# Altium PCB 把手指纹密码锁20201030.PcbDoc (part 2 of 2)
Units mm, origin at the board's own origin, x right, y up, seen from the top; angles counter-clockwise.
Board outline 142.19 x 18 mm, 2 copper layers (Top Layer, Bottom Layer); 76 components, 61 nets, 259 pads, 300 vias.
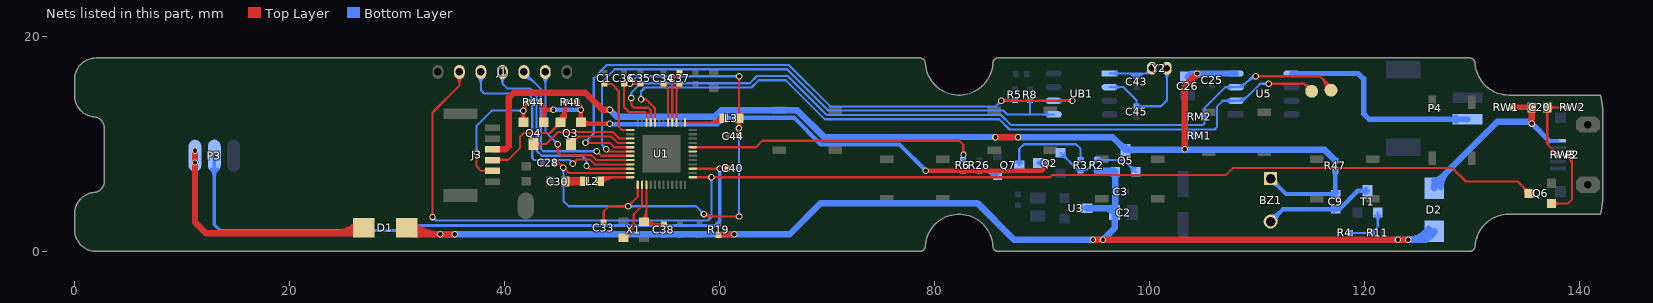
[diagram p2: the nets of this part, all layers, seen from the top]

## Via types
v1: diameter 0.6, hole 0.4, Top Layer to Bottom Layer, tented both sides, 300 vias

## Nets (pads, with @x,y where several pads share a name; then routed paths per layer and width w, separated by ;. In a path a pad name is that pad's centre, name@x,y a point inside that pad or via, vN(x,y) a via of type N, cw(c..) or ccw(c..) an arc to the next point about the centre after c; other vN are vias at no path point) (continued)
MOTO-: P4.1 U5.5 | length 21
  Bottom Layer w0.5: U5.5@113.225,16.555 119.42,16.555 119.925,16.05 119.925,12.825 120.45,12.3 P4.1@129.6,12.3 ; P4.1@128.523,12.123 ccw(c128.096,11.696) 128.096,12.3 ccw(c128.096,12.904) P4.1@128.523,12.477
NetBZ1_1: BZ1.1 C9.1 R47.1 | length 15.6
  Bottom Layer w0.2: C9.1@117.113,5.548 ccw(c116.601,6.06) 117.325,6.06 ccw(c118.049,6.06) C9.1@117.537,5.548 ; R47.1@117.217,7.333 cw(c116.955,7.071) 117.325,7.071 ; R47.1@117.3,7.442 117.325,7.417 C9.1@117.325,5.336 ; 117.325,7.069 cw(c117.698,7.069) R47.1@117.434,7.333
  Bottom Layer w0.4: BZ1.1@111.275,6.375 cw(c111.275,5.409) 111.958,6.092 cw(c112.641,6.775) BZ1.1@111.675,6.775 ; BZ1.1@111.275,6.775 112.714,5.336 C9.1@117.325,5.336 117.3,5.361 R47.1@117.3,7.442 ; C9.1@117.134,5.195 ccw(c116.792,4.853) 116.792,5.336 ccw(c116.792,5.819) 117.134,5.478 ccw(c116.732,5.879) 117.3,5.879 ; 117.3,5.759 ccw(c117.697,5.759) C9.1@117.416,5.478
NetBZ1_2: BZ1.2 C9.2 T1.3 | length 14.6
  Bottom Layer w0.4: BZ1.2@111.275,2.775 112.414,3.914 C9.2@117.325,3.914 117.664,3.914 119.391,5.641 T1.3@120.3,5.641 ; BZ1.2@111.275,3.225 ccw(c111.275,4.311) 112.043,3.543 ccw(c112.811,2.775) BZ1.2@111.725,2.775 ; C9.2@117.134,3.772 ccw(c116.792,3.431) 116.792,3.914 ccw(c116.792,4.397) C9.2@117.134,4.055 ; C9.2@117.375,4.114 ccw(c117.375,5.294) 118.209,4.459 ; T1.3@120.118,5.459 ccw(c119.679,5.02) 119.679,5.641 ccw(c119.679,6.262) T1.3@120.118,5.823
NetC1_1: C1.1 U1.37 | length 6.7
  Top Layer w0.2: C1.1@49.3,15.592 49.967,15.592 50.625,14.934 50.625,11.6 50.925,11.3 U1.37@51.7,11.3 ; C1.1@49.434,15.483 cw(c49.697,15.22) 49.697,15.592 cw(c49.697,15.964) C1.1@49.434,15.701
NetC20_2: C20.2 RW2.2 RW3.2 | length 10.1
  Top Layer w0.2: C20.2@136.799,13.138 cw(c136.287,12.626) 137.011,12.626 cw(c137.735,12.626) C20.2@137.223,13.138 ; C20.2@137.223,13.188 cw(c137.735,12.676) 137.735,13.4 cw(c137.735,14.124) C20.2@137.223,13.612 ; 137.686,9.306 ccw(c137.992,9.613) RW3.2@137.992,9.179 ; RW3.2@137.747,9.245 cw(c137.528,9.025) RW3.2@137.838,9.025 ; RW3.2@137.992,9 137.011,9.981 C20.2@137.011,13.4 RW2.2@138.892,13.4 ; RW2.2@138.783,13.291 ccw(c138.52,13.028) 138.52,13.4 ccw(c138.52,13.772) RW2.2@138.783,13.509
NetC30_1: C30.1 L2.1 | length 1.8
  Top Layer w0.8: C30.1@45.661,6.5 45.686,6.525 L2.1@47.439,6.525
NetC34_1: C34.1 U1.29 | length 4.3
  Top Layer w0.2: C34.1@54.8,15.592 55.2,15.192 U1.29@55.2,12 ; C34.1@54.825,15.438 cw(c54.825,15.128) C34.1@55.045,15.347 ; C34.1@54.979,15.592 ccw(c55.413,15.592) 55.106,15.286
NetC37_1: C37.1 U1.28 | length 5.5
  Top Layer w0.2: U1.28@55.6,12 55.6,15.958 C37.1@56.275,16.633 ; 55.969,16.327 ccw(c55.662,16.633) C37.1@56.096,16.633 ; C37.1@56.03,16.388 cw(c56.25,16.169) C37.1@56.25,16.479
NetC37_2: C37.2 U1.27 | length 5.8
  Top Layer w0.2: U1.27@56,12 56,15.342 ; 56,14.643 cw(c57.224,14.643) C37.2@56.358,15.508 ; 56,15.125 cw(c56.741,15.125) C37.2@56.217,15.65 ; C37.2@56.03,15.372 cw(c56.25,15.153) C37.2@56.25,15.463 ; C37.2@56.096,15.604 cw(c55.765,15.577) 56,15.342 ; C37.2@56.275,15.617 56,15.342
NetC38_2: C38.2 U1.3 X1.3 | length 10.3
  Top Layer w0.2: X1.3@52.813,2.987 ccw(c51.878,3.922) 53.2,3.922 ; X1.3@52.954,2.704 ccw(c53.368,3.118) X1.3@53.368,2.533 ; X1.3@52.954,2.846 ccw(c52.361,3.439) 53.2,3.439 ; X1.3@53.096,2.846 ccw(c53.851,3.601) 53.851,2.533 ; U1.3@53.2,6.2 53.2,3 X1.3@52.975,2.775 53.217,2.533 C38.2@54.825,2.533 ; X1.3@53.237,2.987 ccw(c54.334,4.084) 54.334,2.533 ; C38.2@54.691,2.424 ccw(c54.428,2.161) 54.428,2.533 ccw(c54.428,2.905) C38.2@54.691,2.642
NetC43_1: C43.1 UB1.1 Y2.1 | length 8.8
  Bottom Layer w0.2: UB1.1@96.3,16.555 C43.1@98.8,16.555 ; UB1.1@96.891,16.414 cw(c97.233,16.072) 97.233,16.555 cw(c97.233,17.038) UB1.1@96.891,16.696 ; 97.806,16.555 cw(c97.806,15.34) C43.1@98.666,16.199 ; 98.289,16.555 cw(c98.289,15.823) C43.1@98.807,16.341 ; C43.1@98.791,16.339 cw(c99.279,15.897) 99.279,16.555 ; C43.1@98.8,16.308 98.8,16.53 98.825,16.555 99.73,16.555 ; C43.1@98.94,16.205 cw(c99.73,15.488) 99.73,16.555 ; 99.734,16.559 ccw(c99.392,16.9) Y2.1@99.875,16.9 ; Y2.1@100.05,16.597 ccw(c99.917,16.368) 99.73,16.555 ; Y2.1@100.225,17.05 99.73,16.555
NetC45_2: C45.2 UB1.2 Y2.2 | length 12.9
  Bottom Layer w0.2: UB1.2@96.3,15.285 97.59,15.285 98.8,14.075 C45.2@98.8,13.508 101.083,13.508 101.625,14.05 Y2.2@101.625,17.05 ; UB1.2@96.891,15.144 cw(c97.233,14.802) 97.233,15.285 cw(c97.233,15.768) UB1.2@96.891,15.426 ; C45.2@98.691,13.617 ccw(c98.428,13.88) 98.8,13.88 ccw(c99.172,13.88) C45.2@98.909,13.617 ; C45.2@98.934,13.399 cw(c99.197,13.136) 99.197,13.508 cw(c99.197,13.88) C45.2@98.934,13.617 ; Y2.2@101.378,16.653 cw(c100.78,16.055) 101.625,16.055 cw(c102.47,16.055) Y2.2@101.873,16.653
NetD1_1: D1.1 P3.3 | length 27.9
  Top Layer w0.6: v1(11.2,8.275) 11.2,2.725 12.225,1.7 26.4,1.7 D1.1@26.9,2.2 ; v1(11.2,9.375) 11.2,8.325 v1@11.225,8.3 ; 24.144,1.7 ccw(c24.144,4.856) D1.1@26.376,2.624 ; 25.593,1.7 ccw(c25.593,3.407) D1.1@26.8,2.2
  Bottom Layer w0.6: v1(11.2,8.275) v1(11.2,9.375)
NetL2_2: L2.2 U1.48 | length 6.2
  Top Layer w0.2: L2.2@48.79,6.646 cw(c49.404,6.032) 49.404,6.9 ; L2.2@48.861,6.525 49.236,6.9 U1.48@51.7,6.9 ; L2.2@48.932,6.504 cw(c49.887,5.549) 49.887,6.9 ; L2.2@49.073,6.363 cw(c50.37,5.066) 50.37,6.9
NetL3_1: L3.1 U1.25 | length 7.1
  Top Layer w0.2: U1.25@56.8,12 59.989,12 L3.1@60.389,12.4 ; 58.82,12 ccw(c58.82,13.919) L3.1@60.177,12.562 ; 59.302,12 ccw(c59.302,13.436) L3.1@60.318,12.421 ; 59.785,12 ccw(c59.785,12.954) L3.1@60.46,12.279
NetQ2_G: Q2.G Q5.G R2.2 R3.1 | length 14
  Bottom Layer w0.2: Q2.G@91.741,8.818 cw(c91.741,7.955) 92.351,8.565 cw(c92.961,9.175) Q2.G@92.098,9.175 ; Q2.G@91.741,9.175 93.291,7.625 ; 93.034,7.882 ccw(c93.575,8.422) R3.1@93.575,7.658 ; R3.1@93.412,7.504 R3.1@93.6,7.504 ; R3.1@93.421,7.499 ccw(c93.291,7.495) 93.291,7.625 ; R3.1@93.473,7.619 cw(c93.385,7.719) 93.291,7.625 ; R3.1@93.745,7.407 cw(c94.205,7.031) 94.205,7.625 ; 94.794,8.214 ccw(c94.487,8.52) R2.2@94.921,8.52 ; R2.2@94.855,8.275 cw(c95.075,8.055) R2.2@95.075,8.366 ; R2.2@95.234,8.411 cw(c95.497,8.148) 95.497,8.52 cw(c95.497,8.892) R2.2@95.234,8.629 ; Q5.G@98.368,7.409 ccw(c97.505,7.409) 98.115,8.019 ccw(c98.725,8.629) Q5.G@98.725,7.766 ; Q5.G@98.725,7.409 97.614,8.52 R2.2@95.1,8.52 94.205,7.625 ; 93.291,7.625 94.205,7.625
NetQ6_B: Q6.B RW3.1 | length 10.1
  Top Layer w0.2: Q6.B@137.416,4.45 138.925,4.45 139.325,4.85 139.325,8.683 RW3.1@139.008,9 ; Q6.B@137.646,4.22 cw(c138.201,3.665) 138.201,4.45 cw(c138.201,5.235) Q6.B@137.646,4.68 ; RW3.1@138.899,8.866 cw(c137.871,7.838) 139.325,7.838 ; RW3.1@139.008,8.821 cw(c139.008,8.387) 139.314,8.694 ; RW3.1@139.041,9.007 cw(c138.354,8.32) 139.325,8.32 ; RW3.1@139.162,8.975 ccw(c139.472,8.975) RW3.1@139.253,8.755
NetQ7_B: Q7.B R6.1 R26.1 | length 11
  Bottom Layer w0.2: R6.1@82.65,7.504 R26.1@84.175,7.504 ; R6.1@82.784,7.395 cw(c83.047,7.132) 83.047,7.504 cw(c83.047,7.876) R6.1@82.784,7.613 ; R26.1@84.041,7.395 ccw(c83.778,7.132) 83.778,7.504 ccw(c83.778,7.876) R26.1@84.041,7.613 ; R26.1@84.282,7.373 cw(c84.467,7.074) 84.548,7.417 ; R26.1@84.309,7.395 cw(c84.572,7.132) 84.572,7.504 cw(c84.572,7.876) R26.1@84.309,7.613 ; R26.1@84.331,7.585 ccw(c84.664,7.792) 84.575,7.41 ; 84.622,7.504 cw(c84.622,5.97) Q7.B@85.766,6.992 ; 85.069,7.504 cw(c85.069,6.369) Q7.B@85.915,7.125 ; 85.515,7.504 cw(c85.515,6.768) Q7.B@86.064,7.258 ; Q7.B@85.54,7.139 ccw(c85.145,7.219) 85.43,7.504 ; Q7.B@85.617,6.859 ccw(c84.175,5.571) R26.1@84.175,7.504 ; Q7.B@85.795,7.394 cw(c85.715,7.789) 85.43,7.504 ; Q7.B@85.859,7.075 85.43,7.504 ; R26.1@84.175,7.504 85.43,7.504
NetQ7_C: Q7.C R3.2 | length 10.4
  Bottom Layer w0.2: Q7.C@87.661,8.255 ccw(c87.106,8.81) 87.891,8.81 ccw(c88.676,8.81) Q7.C@88.121,8.255 ; Q7.C@87.891,8.025 87.891,9.541 88.325,9.975 93.175,9.975 93.6,9.55 R3.2@93.6,8.52 ; R3.2@93.491,8.629 ccw(c93.228,8.892) 93.6,8.892 ccw(c93.972,8.892) R3.2@93.709,8.629
NetR4_1: R4.1 R11.1 T1.1 | length 7.2
  Bottom Layer w0.2: R4.1@118.683,1.725 120.692,1.725 R11.1@120.717,1.75 121.25,2.283 T1.1@121.25,3.609 ; R4.1@118.792,1.616 cw(c119.055,1.353) 119.055,1.725 cw(c119.055,2.097) R4.1@118.792,1.834 ; 120.344,1.725 cw(c120.344,1.352) R11.1@120.608,1.616 ; 120.346,1.725 ccw(c120.346,2.095) R11.1@120.608,1.833 ; R11.1@120.717,1.929 ccw(c120.717,2.363) 121.023,2.056 ; R11.1@120.871,1.775 cw(c121.181,1.775) R11.1@120.962,1.995 ; T1.1@120.997,3.356 cw(c120.388,2.747) 121.25,2.747 cw(c122.112,2.747) T1.1@121.503,3.356
NetU1_2: U1.2 X1.1 | length 6.8
  Top Layer w0.2: X1.1@51.075,1.275 52.025,2.225 52.025,3.475 52.8,4.25 U1.2@52.8,6.2 ; X1.1@51.125,1.575 ccw(c51.125,2.179) 51.552,1.752 ; X1.1@51.425,1.275 cw(c52.27,1.275) 51.672,1.872
P04/SCK: J1.3 U1.43 | length 20.1
  Top Layer w0.2: v1@48.575,9.125 cw(c48.575,8.642) 48.916,8.984 cw(c49.258,9.325) v1@48.775,9.325 ; v1(48.575,9.325) 49,8.9 51.234,8.9 U1.43@51.7,8.9
  Bottom Layer w0.2: J1.3@41.8,16.15 cw(c41.8,14.822) 42.739,15.761 ; J1.3@41.8,16.35 cw(c41.8,15.505) 42.397,16.103 ; J1.3@41.8,16.7 43.375,15.125 43.375,9.575 ; J1.3@42.2,16.55 ccw(c42.804,16.55) 42.377,16.123 ; 43.381,9.55 43.606,9.325 v1(48.575,9.325) ; v1@48.434,9.184 ccw(c48.092,8.842) 48.092,9.325 ccw(c48.092,9.808) v1@48.434,9.466
P05/MOSI: J1.2 U1.44 | length 18
  Top Layer w0.2: v1@44.809,9.834 cw(c44.467,9.492) 44.95,9.492 cw(c45.433,9.492) v1@45.091,9.834 ; v1(44.95,9.975) 44.95,9.25 45.25,8.95 48.101,8.95 48.551,8.5 U1.44@51.7,8.5
  Bottom Layer w0.2: J1.2@43.517,16.267 cw(c42.834,15.584) 43.8,15.584 cw(c44.766,15.584) J1.2@44.083,16.267 ; J1.2@43.8,16.7 43.8,11.125 v1(44.95,9.975) ; v1@44.75,9.975 ccw(c44.267,9.975) 44.609,10.316 ccw(c44.95,10.658) v1@44.95,10.175
P06/MISO: J1.5 U1.45 | length 24.7
  Top Layer w0.2: v1(46.35,8.15) 46.75,8.55 47.936,8.55 48.386,8.1 49,8.1 U1.45@51.7,8.1 ; v1@46.35,8.35 ccw(c46.35,8.833) 46.691,8.491 ccw(c47.033,8.15) v1@46.55,8.15
  Bottom Layer w0.2: J1.5@37.517,16.267 cw(c36.834,15.584) 37.8,15.584 cw(c38.766,15.584) J1.5@38.083,16.267 ; J1.5@37.8,16.7 37.8,15.025 38.125,14.7 42.15,14.7 42.575,14.275 42.575,8.7 42.775,8.5 46.078,8.5 ; 46.141,8.437 ccw(c46.35,8.645) v1@46.35,8.35 ; v1@46.157,8.202 ccw(c45.86,8.283) 46.078,8.5 ; v1@46.252,8.325 46.078,8.5
P07/NSS: J1.4 U1.46 | length 22.3
  Top Layer w0.2: v1@47.55,7.925 v1@47.575,7.9 ; v1(47.625,7.95) 47.875,7.7 ; v1@47.673,7.756 cw(c47.725,7.55) 47.875,7.7 ; v1@47.819,7.902 ccw(c48.025,7.85) 47.875,7.7 ; U1.46@51.7,7.7 47.875,7.7
  Bottom Layer w0.2: J1.4@39.526,16.259 cw(c38.931,15.625) 39.8,15.625 ; J1.4@39.8,16.7 39.8,15.625 ; J1.4@40.074,16.259 ccw(c40.669,15.625) 39.8,15.625 ; v1@47.484,8.091 ccw(c47.142,8.433) 47.625,8.433 ccw(c48.108,8.433) v1@47.766,8.091 ; v1(47.625,7.95) 47.625,8.475 47.2,8.9 43.45,8.9 42.975,9.375 42.975,14.575 42.375,15.175 40.25,15.175 39.8,15.625
PWR_CTL: R6.2 U1.20 | length 29
  Top Layer w0.2: U1.20@57.5,9.7 63.391,9.7 63.991,10.3 82.3,10.3 82.675,9.925 82.675,9.025 v1(82.7,9) ; v1@82.559,9.141 ccw(c82.278,9.422) 82.675,9.422 ; 82.675,9.543 ccw(c83.243,9.543) v1@82.841,9.141
  Bottom Layer w0.2: R6.2@82.567,8.629 ccw(c82.244,8.951) v1@82.7,8.951 ; v1@82.571,8.847 cw(c82.338,8.57) R6.2@82.7,8.57 ; R6.2@82.65,8.52 R6.2@82.7,8.57 ; v1@82.7,8.832 ccw(c82.988,8.832) R6.2@82.784,8.629 ; v1(82.7,9) R6.2@82.7,8.57 ; v1@82.829,8.847 ccw(c83.062,8.57) R6.2@82.7,8.57
REMOTO: U1.19
RSTN: J1.6 Q6.C U1.13 | length 130.5
  Top Layer w0.2: v1@33.159,3.341 ccw(c32.817,3.683) 33.3,3.683 ccw(c33.783,3.683) v1@33.441,3.341 ; v1(33.3,3.2) 33.3,12.925 35.8,15.425 J1.6@35.8,16.7 ; J1.6@35.517,16.267 cw(c34.834,15.584) 35.8,15.584 cw(c36.766,15.584) J1.6@36.083,16.267 ; U1.13@57.5,6.9 v1(59.25,6.9) 90.744,6.9 90.944,7.1 107.1,7.1 107.75,7.75 128.2,7.75 129.45,6.5 134.284,6.5 Q6.C@135.384,5.4 ; v1@59.109,6.759 ccw(c58.767,6.417) 58.767,6.9 ccw(c58.767,7.383) v1@59.109,7.041 ; v1@59.391,6.759 cw(c59.733,6.417) 59.733,6.9 cw(c59.733,7.383) v1@59.391,7.041 ; 134.701,6.083 cw(c134.018,5.4) Q6.C@134.984,5.4 ; 134.882,5.902 ccw(c135.309,6.329) Q6.C@135.309,5.725 ; Q6.C@135.043,5.741 cw(c134.701,5.4) Q6.C@135.184,5.4
  Bottom Layer w0.2: v1(33.3,3.2) 33.625,2.875 ; v1@33.307,3 cw(c33.322,2.572) 33.625,2.875 ; v1@33.5,3.193 ccw(c33.928,3.178) 33.625,2.875 ; v1@59.109,6.759 cw(c58.767,6.417) 59.25,6.417 cw(c59.733,6.417) v1@59.391,6.759 ; v1(59.25,6.9) 59.25,3.2 58.925,2.875 33.625,2.875
RX2/MOTO0: pad.0 RM1.2 U1.32 U5.2 | length 79.2
  Top Layer w0.2: v1(52.7,14.15) 53.166,14.15 ; v1@52.845,14.012 cw(c53.166,13.708) 53.166,14.15 ; v1@52.845,14.288 ccw(c53.166,14.592) 53.166,14.15 ; U1.32@54,12 54,13.309 53.25,14.059 53.25,14.066 53.166,14.15 ; v1(111.1,15.6) 114.4,15.6 ; v1@111.241,15.459 cw(c111.583,15.117) 111.583,15.6 cw(c111.583,16.083) v1@111.241,15.741 ; pad.0@114.606,14.975 ccw(c113.884,15.084) 114.4,15.6 ; pad.0@115.025,15.394 cw(c114.916,16.116) 114.4,15.6 ; pad.0@115.1,14.9 114.4,15.6
  Bottom Layer w0.2: v1@52.559,14.291 ccw(c52.217,14.633) 52.7,14.633 ccw(c53.183,14.633) v1@52.841,14.291 ; v1(52.7,14.15) 52.7,14.875 53.075,15.25 62.984,15.25 63.659,15.925 66.175,15.925 69.8,12.3 86.032,12.3 86.982,11.35 104.125,11.35 ; RM1.2@104.008,10.884 ccw(c103.745,11.147) 104.117,11.147 ccw(c104.489,11.147) RM1.2@104.226,10.884 ; RM1.2@104.117,10.75 104.117,11.342 104.125,11.35 ; U5.2@107.434,13.874 ccw(c107.092,13.532) 107.092,14.015 ccw(c107.092,14.498) U5.2@107.434,14.156 ; U5.2@108.475,14.015 ccw(c108.475,14.594) 108.885,14.185 ; U5.2@108.475,14.215 ccw(c108.475,15.277) 109.226,14.526 ; v1@110.959,15.459 ccw(c110.617,15.117) 110.617,15.6 ccw(c110.617,16.083) v1@110.959,15.741 ; v1(111.1,15.6) 110.3,15.6 108.715,14.015 U5.2@108.025,14.015 106.815,14.015 106.3,13.5 106.3,11.6 106.05,11.35 104.125,11.35
SCL: R5.1 U1.41 UB1.6 | length 67
  Top Layer w0.2: v1(47.527,10.1) 49.8,10.1 50.2,9.7 U1.41@51.7,9.7 ; v1@47.669,9.959 cw(c48.01,9.618) 48.01,10.1 cw(c48.01,10.583) v1@47.669,10.242 ; v1(86.225,14.015) v1(92.84,14.015) ; v1@86.366,13.874 cw(c86.708,13.532) 86.708,14.015 cw(c86.708,14.498) v1@86.366,14.156 ; v1@92.699,13.874 ccw(c92.357,13.532) 92.357,14.015 ccw(c92.357,14.498) v1@92.699,14.156
  Bottom Layer w0.2: v1(47.527,10.1) 47.527,10.202 48.3,10.975 48.3,16.125 49.525,17.35 66.447,17.35 70.297,13.5 85.71,13.5 v1(86.225,14.015) 87.423,14.015 R5.1@87.475,14.067 ; v1@47.527,10.3 ccw(c47.527,10.538) 47.695,10.37 ; v1@47.727,10.1 cw(c48.456,10.1) 47.941,10.616 ; v1@86.025,14.015 cw(c85.542,14.015) 85.884,13.674 cw(c86.225,13.332) v1@86.225,13.815 ; v1@86.366,13.874 cw(c86.708,13.532) 86.708,14.015 cw(c86.708,14.498) v1@86.366,14.156 ; 86.952,14.015 ccw(c86.952,14.564) R5.1@87.341,14.176 ; UB1.6@91.1,14.015 v1(92.84,14.015) ; UB1.6@91.691,13.874 cw(c92.033,13.532) 92.033,14.015 cw(c92.033,14.498) UB1.6@91.691,14.156 ; v1@92.699,13.874 ccw(c92.357,13.532) 92.357,14.015 ccw(c92.357,14.498) v1@92.699,14.156
SDA: R8.1 U1.42 UB1.5 | length 56.4
  Top Layer w0.2: v1(49.475,9.5) 49.675,9.3 U1.42@51.7,9.3
  Bottom Layer w0.2: v1@49.275,9.5 ccw(c48.792,9.5) 49.134,9.841 ccw(c49.475,10.183) v1@49.475,9.7 ; v1(49.475,9.5) 49.077,9.898 49.077,15.777 50.25,16.95 66.281,16.95 70.056,13.175 70.131,13.1 86.425,13.1 86.78,12.745 88.9,12.745 ; R8.1@88.791,13.958 cw(c88.528,13.695) 88.9,13.695 cw(c89.272,13.695) R8.1@89.009,13.958 ; R8.1@88.9,14.067 88.9,12.745 ; UB1.5@90.509,12.604 ccw(c90.167,12.262) 90.167,12.745 ccw(c90.167,13.228) UB1.5@90.509,12.886 ; UB1.5@91.1,12.745 88.9,12.745
SETKEY: C40.1 P3.2 U1.15 | length 66.5
  Top Layer w0.2: U1.15@57.5,7.7 v1(60.025,7.7) 60.692,7.7 C40.1@60.717,7.725 ; v1@59.884,7.559 ccw(c59.542,7.217) 59.542,7.7 ccw(c59.542,8.183) v1@59.884,7.841 ; v1@60.166,7.559 cw(c60.508,7.217) 60.508,7.7 cw(c60.508,8.183) v1@60.166,7.841 ; 60.344,7.7 cw(c60.344,7.327) C40.1@60.608,7.591 ; 60.346,7.7 ccw(c60.346,8.07) C40.1@60.608,7.808
  Bottom Layer w0.3: P3.2@12.682,7.682 cw(c11.914,6.914) 13,6.914 cw(c14.086,6.914) P3.2@13.318,7.682 ; P3.2@13,8.9 13,2.5 13.55,1.95 31.45,1.95 31.925,2.425 59.65,2.425 60.025,2.8 v1(60.025,7.7) ; v1@59.919,7.594 cw(c59.663,7.338) 60.025,7.338 cw(c60.387,7.338) v1@60.131,7.594
TX2/MOTO1: pad.1 RM2.2 U1.33 U5.3 | length 85.4
  Top Layer w0.2: v1@51.659,14.134 cw(c51.317,13.792) 51.8,13.792 cw(c52.283,13.792) v1@51.941,14.134 ; v1(51.8,14.275) 51.8,13.625 52.05,13.375 53.369,13.375 53.6,13.144 U1.33@53.6,12 ; v1(109.9,16.3) 115.9,16.3 ; v1@110.041,16.159 cw(c110.383,15.817) 110.383,16.3 cw(c110.383,16.783) v1@110.041,16.441 ; 116.223,15.977 cw(c115.31,15.064) pad.1@116.6,15.012 ; pad.1@116.4,15.02 ccw(c114.689,15.089) 115.9,16.3 ; 116.546,15.654 cw(c115.931,15.039) pad.1@116.8,15.004 ; 116.559,15.641 ccw(c116.9,15.983) pad.1@116.9,15.5 ; pad.1@116.9,15 116.9,15.3 115.9,16.3
  Bottom Layer w0.2: v1@51.659,14.416 ccw(c51.317,14.758) 51.8,14.758 ccw(c52.283,14.758) v1@51.941,14.416 ; v1(51.8,14.275) 51.8,14.772 52.678,15.65 62.819,15.65 63.494,16.325 66.341,16.325 69.966,12.7 86.198,12.7 87.148,11.75 104.95,11.75 105.133,11.933 RM2.2@105.133,12.55 105.133,13.358 107.06,15.285 U5.3@108.025,15.285 108.585,15.285 109.6,16.3 v1(109.9,16.3) ccw(c109.9,15.576) 109.388,16.088 ; RM2.2@105.024,12.416 cw(c104.761,12.153) 105.133,12.153 cw(c105.505,12.153) RM2.2@105.242,12.416 ; RM2.2@105.024,12.684 ccw(c104.761,12.947) 105.133,12.947 ccw(c105.505,12.947) RM2.2@105.242,12.684 ; U5.3@107.434,15.144 ccw(c107.092,14.802) 107.092,15.285 ccw(c107.092,15.768) U5.3@107.434,15.426 ; U5.3@108.475,15.485 ccw(c108.475,16.233) 109.004,15.704 ; U5.3@108.675,15.285 cw(c108.892,15.285) 108.739,15.439 ; 109.046,15.746 cw(c109.9,14.893) v1@109.9,16.1
UART_RD: J3.5 Q4.S R44.1 | length 21.4
  Top Layer w0.2: v1@37.259,9.059 cw(c36.917,8.717) 37.4,8.717 cw(c37.883,8.717) v1@37.541,9.059 ; v1(37.4,9.2) 37.4,7.9 37.8,7.5 J3.5@38.9,7.5 ; J3.5@38.359,7.359 ccw(c38.017,7.017) 38.017,7.5 ccw(c38.017,7.983) J3.5@38.359,7.641 ; Q4.S@41.497,12.269 ccw(c40.888,12.878) 41.75,12.878 ccw(c42.612,12.878) Q4.S@42.003,12.269 ; v1@41.585,12.987 cw(c41.138,12.683) 41.66,12.543 ; v1@41.609,12.959 cw(c41.267,12.617) 41.75,12.617 cw(c42.233,12.617) v1@41.891,12.959 ; v1@41.645,13.27 ccw(c41.53,13.458) 41.75,13.458 ; v1@41.65,12.927 cw(c41.506,12.678) 41.784,12.753 ; 41.716,12.753 cw(c41.993,12.678) v1@41.85,12.927 ; Q4.S@41.75,12.016 v1(41.75,13.1) ; 41.84,12.543 cw(c42.362,12.683) v1@41.915,12.987 ; v1@41.855,13.27 cw(c41.97,13.458) 41.75,13.458 ; 41.886,13.594 cw(c42.192,13.287) R44.1@42.192,13.721 ; 41.918,13.626 ccw(c42.344,13.2) v1(41.75,13.1) ; v1@41.947,13.133 cw(c42.813,13.279) R44.1@42.192,13.9 ; R44.1@41.947,13.655 ccw(c41.728,13.875) R44.1@42.038,13.875 ; R44.1@42.192,13.9 41.75,13.458 ; v1(41.75,13.1) 41.75,13.458
  Bottom Layer w0.2: v1@37.259,9.341 ccw(c36.917,9.683) 37.4,9.683 ccw(c37.883,9.683) v1@37.541,9.341 ; v1(37.4,9.2) 37.4,11.7 38.8,13.1 v1(41.75,13.1) ; v1@41.609,12.959 ccw(c41.267,12.617) 41.267,13.1 ccw(c41.267,13.583) v1@41.609,13.241
UART_RD1: Q4.D U1.39 | length 11.1
  Top Layer w0.2: Q4.D@42.7,9.984 43.859,9.984 44.975,11.1 50.09,11.1 50.691,10.5 U1.39@51.7,10.5 ; Q4.D@42.953,9.731 cw(c43.562,9.122) 43.562,9.984 cw(c43.562,10.846) Q4.D@42.953,10.237
UART_TD: J3.4 Q3.S R41.1 | length 19.8
  Top Layer w0.2: J3.4@38.9,8.5 38.936,8.536 40.336,8.536 41.45,9.65 41.45,10.675 41.8,11.025 44.229,11.025 Q3.S@45.22,12.016 45.692,12.488 ; J3.4@39.441,8.359 cw(c39.87,7.93) 39.87,8.536 ; J3.4@39.441,8.641 ccw(c39.695,8.895) 39.695,8.536 ; Q3.S@44.863,12.016 cw(c44,12.016) 44.61,11.406 cw(c45.22,10.796) Q3.S@45.22,11.659 ; Q3.S@44.979,12.279 ccw(c43.495,13.9) R41.1@45.692,13.9 45.692,12.488 ; Q3.S@45.114,12.132 ccw(c43.911,13.446) 45.692,13.446 ; Q3.S@45.249,11.984 ccw(c44.327,12.991) 45.692,12.991 ; Q3.S@45.29,12.366 ccw(c45.377,12.803) 45.692,12.488 ; Q3.S@45.384,11.837 ccw(c44.743,12.537) 45.692,12.537 ; R41.1@45.564,13.79 cw(c45.268,13.594) 45.615,13.523 ; Q3.S@45.57,12.086 cw(c46.007,12.173) 45.692,12.488 ; R41.1@45.583,13.766 cw(c45.32,13.503) 45.692,13.503 cw(c46.064,13.503) R41.1@45.801,13.766 ; 45.61,13.499 cw(c45.991,13.421) R41.1@45.777,13.746
UART_TD1: Q3.D U1.40 | length 7.8
  Top Layer w0.2: Q3.D@46.17,9.984 46.886,10.7 ; Q3.D@46.178,10.234 ccw(c46.206,10.747) Q3.D@46.569,10.384 ; Q3.D@46.189,10.433 ccw(c46.239,11.348) 46.886,10.7 ; Q3.D@46.527,10.077 cw(c47.165,10.077) 46.714,10.528 ; U1.40@51.7,10.1 50.525,10.1 49.925,10.7 46.886,10.7
V6V: C25.1 C26.1 J3.3 Q5.D R47.2 U5.4 | length 103
  Top Layer w0.6: J3.3@38.9,9.5 40.1,9.5 40.375,9.775 40.375,14.3 40.85,14.775 47.51,14.775 49.11,13.175 v1(49.8,13.175) ; v1(85.675,10.625) v1(87.775,10.625) ; v1(103.3,9.5) 103.3,15.405 v1(104.45,16.555)
  Bottom Layer w0.6: v1(49.8,13.175) 50.45,12.525 59.525,12.525 60.15,13.15 67.215,13.15 69.715,10.65 85.65,10.65 v1(85.675,10.625) ; v1(87.775,10.625) 96.591,10.625 Q5.D@97.775,9.441 103.241,9.441 v1(103.3,9.5) ; Q5.D@97.348,9.868 ccw(c97.775,10.295) Q5.D@97.775,9.691 ; v1@103.3,9.441 116.317,9.441 R47.2@117.3,8.458 ; C26.1@103.9,16.066 cw(c105.081,14.886) 105.081,16.555 ; 104.767,16.492 cw(c104.684,16.907) v1(104.45,16.555) ; U5.4@108.025,16.555 v1(104.45,16.555) ; v1(104.45,16.555) ccw(c104.38,15.383) C26.1@103.55,16.213 103.892,16.555 v1(104.45,16.555) ; v1(104.45,16.555) ccw(c104.45,16.047) 103.956,16.165 cw(c104.45,16.047) v1(104.45,16.555)
VBAT: C2.1 C3.1 D1.2 D2.2 Q5.S R2.1 R19.1 U3.3 | length 125.1
  Top Layer w0.6: D1.2@30.9,2.2 31.5,1.6 v1(34.025,1.6) v1(35.375,1.6) ; D1.2@31,2.2 ccw(c32.449,3.649) 32.449,1.6 ; D1.2@31.424,2.624 ccw(c33.897,5.097) v1@33.897,1.6 ; R19.1@59.925,1.517 60.008,1.6 v1(61.375,1.6) ; v1(94.75,1.1) v1(95.675,1.1) v1(123.125,1.1) v1(124.075,1.1)
  Bottom Layer w0.6: v1(34.025,1.6) v1(35.375,1.6) v1(61.375,1.6) 66.525,1.6 69.425,4.5 84,4.5 87.4,1.1 v1(94.75,1.1) v1(95.675,1.1) 96.762,2.187 C2.1@96.762,3.617 ; U3.3@94.141,4.025 96.354,4.025 C2.1@96.762,3.617 ; R2.1@95.1,7.504 96.73,7.504 Q5.S@96.825,7.409 96.825,3.68 C2.1@96.762,3.617 ; 95.765,4.025 cw(c95.765,2.824) C2.1@96.615,3.673 ; 96.216,7.504 cw(c96.216,6.8) Q5.S@96.714,7.298 ; C2.1@96.615,3.967 ccw(c96.107,4.475) 96.825,4.475 ; v1(123.125,1.1) v1(124.075,1.1) ; 125.194,1.1 ccw(c125.194,2.668) D2.2@126.5,1.8 ; D2.2@126,2.132 cw(c124.075,3.412) v1(124.075,1.1) ; D2.2@126.5,1.9 125.7,1.1 v1(124.075,1.1)
VBUS: C20.1 D2.1 P2.1 RW1.1 | length 21.1
  Top Layer w0.5: RW1.1@133.708,13.4 C20.1@135.589,13.4 C20.1@135.575,13.386
  Top Layer w0.6: v1(135.575,11.9) C20.1@135.575,13.386
  Bottom Layer w0.3: 137.175,10.3 P2.1@138,10.3
  Bottom Layer w0.5: v1(135.575,11.9) 137.175,10.3
  Bottom Layer w0.6: D2.1@126.5,5.9 126.5,6.2 132.375,12.075 135.4,12.075 v1(135.575,11.9) ccw(c135.153,11.478) 135.153,12.075 ; D2.1@126.5,6.6 ccw(c126.5,7.566) D2.1@127.183,6.883 ; D2.1@127.1,6 cw(c129.031,6) 127.666,7.366
VDD: C28.2 C33.2 C35.2 C36.2 C44.2 L3.2 U1.1 U1.34 U1.47 | length 85
  Top Layer w0.2: C28.2@44.583,8.25 45.025,8.25 v1(45.475,7.8) 45.975,7.3 U1.47@51.7,7.3 ; C28.2@44.692,8.141 cw(c44.955,7.878) 44.955,8.25 cw(c44.955,8.622) C28.2@44.692,8.359 ; v1@45.275,7.8 ccw(c44.792,7.8) 45.134,8.141 ccw(c45.475,8.483) v1@45.475,8 ; v1@45.475,7.6 cw(c45.475,7.117) 45.816,7.459 cw(c46.158,7.8) v1@45.675,7.8 ; C33.2@49.116,2.813 ccw(c48.853,3.076) 49.225,3.076 ccw(c49.597,3.076) C33.2@49.334,2.813 ; C33.2@49.225,2.704 49.225,3.725 49.7,4.2 v1@51.275,4.2 ; C36.2@51.005,15.491 cw(c50.742,15.228) 51.114,15.228 cw(c51.486,15.228) C36.2@51.223,15.491 ; C36.2@51.114,15.6 51.114,13.436 51.575,12.975 53.059,12.975 53.2,12.834 U1.34@53.2,12 ; v1@51.359,4.059 ccw(c51.017,3.717) 51.017,4.2 ccw(c51.017,4.683) v1@51.359,4.341 ; v1(51.5,4.2) 52.4,5.1 U1.1@52.4,6.2 ; v1@51.5,4.4 ccw(c51.5,4.883) 51.841,4.541 ccw(c52.183,4.2) v1@51.7,4.2 ; v1(51.65,15.6) C35.2@52.628,15.6 ; v1@51.791,15.459 cw(c52.133,15.117) 52.133,15.6 cw(c52.133,16.083) v1@51.791,15.741 ; C35.2@52.494,15.491 ccw(c52.231,15.228) 52.231,15.6 ccw(c52.231,15.972) C35.2@52.494,15.709 ; v1@58.616,3.286 cw(c58.667,3.142) 58.775,3.25 ; v1@58.691,3.616 ccw(c59.576,4.501) 59.576,3.25 ; v1@58.739,3.409 ccw(c58.883,3.358) 58.775,3.25 ; 59.093,3.25 cw(c59.093,4.018) v1(58.55,3.475) 58.775,3.25 ; L3.2@61.599,12.138 cw(c61.054,11.592) v1@61.825,11.592 ; L3.2@61.599,12.662 ccw(c61.054,13.208) 61.825,13.208 ; v1@61.667,11.613 ccw(c61.445,11.825) 61.741,11.905 ; v1@61.67,11.334 cw(c61.328,10.992) 61.811,10.992 cw(c62.294,10.992) v1@61.953,11.334 ; v1@61.67,11.616 ccw(c61.295,11.991) L3.2@61.825,11.991 ; v1@61.684,3.109 ccw(c61.342,2.767) 61.342,3.25 ccw(c61.342,3.733) v1@61.684,3.391 ; v1@61.684,16.159 cw(c61.342,15.817) 61.825,15.817 cw(c62.308,15.817) v1@61.966,16.159 ; C44.2@61.699,10.859 ccw(c61.428,11.13) 61.811,11.13 ; v1@61.711,11.648 ccw(c61.528,11.965) 61.882,11.87 ; 61.756,11.851 ccw(c62.078,11.937) v1@61.911,11.648 ; C44.2@61.811,10.728 v1(61.811,11.475) 61.825,11.489 v1(61.825,16.3) ; 61.811,11.114 ccw(c62.172,11.114) C44.2@61.917,10.859 ; v1(61.825,3.25) 58.775,3.25 ; v1@61.825,11.659 cw(c62.502,11.659) L3.2@62.023,12.138 ; 61.825,11.925 ccw(c62.261,11.925) v1@61.953,11.616 ; 61.825,13.141 ccw(c62.502,13.141) L3.2@62.023,12.662 ; 61.9,11.94 ccw(c62.28,11.838) v1@61.969,11.597
  Bottom Layer w0.2: v1@45.334,7.659 cw(c44.992,7.317) 45.475,7.317 cw(c45.958,7.317) v1@45.616,7.659 ; v1(45.475,7.8) 45.475,4.7 45.975,4.2 v1(51.5,4.2) 57.825,4.2 v1(58.55,3.475) ; v1@51.359,4.059 ccw(c51.017,3.717) 51.017,4.2 ccw(c51.017,4.683) v1@51.359,4.341 ; v1@51.641,4.059 cw(c51.983,3.717) 51.983,4.2 cw(c51.983,4.683) v1@51.641,4.341 ; v1(51.65,15.6) 52.35,16.3 v1(61.825,16.3) ; v1@51.65,15.8 ccw(c51.65,16.283) 51.991,15.941 ccw(c52.333,15.6) v1@51.85,15.6 ; v1@58.35,3.475 ccw(c57.867,3.475) 58.209,3.816 ccw(c58.55,4.158) v1@58.55,3.675 ; v1@61.67,11.334 cw(c61.328,10.992) 61.811,10.992 cw(c62.294,10.992) v1@61.953,11.334 ; v1@61.684,3.391 ccw(c61.375,3.7) 61.811,3.7 ; v1@61.684,16.159 ccw(c61.342,15.817) 61.342,16.3 ccw(c61.342,16.783) v1@61.684,16.441 ; 61.811,3.766 ccw(c62.341,3.766) v1@61.966,3.391 ; v1(61.811,11.475) 61.811,3.264 v1(61.825,3.25)
VDD3V3: Q2.D Q3.G Q4.G R41.2 R44.2 | length 60.5
  Top Layer w0.4: R44.2@43.208,13.9 43.65,13.458 43.65,13.175 ; Q4.G@43.468,12.198 ccw(c43.029,12.637) 43.65,12.637 ccw(c44.271,12.637) Q4.G@43.832,12.198 ; Q4.G@43.65,12.016 43.65,13.175 ; v1(44.55,13.175) 43.65,13.175 ; Q3.G@46.938,12.198 ccw(c46.547,12.589) 47.1,12.589 ; v1@47,13.177 ccw(c46.003,13.195) R41.2@46.708,13.9 47.12,13.488 v1@47.12,13.175 ; 47.1,12.685 ccw(c47.789,12.685) 47.302,12.198 ccw(c48.081,12.977) 48.081,11.875 ; v1(47.1,13.175) 47.1,12.036 Q3.G@47.12,12.016 47.261,11.875 v1(49.8,11.875) ; v1(79.2,7.5) 89.975,7.5 v1(90.7,8.225)
  Bottom Layer w0.4: v1(44.55,13.175) v1(47.1,13.175) ; v1(49.8,11.875) 49.85,11.825 59.815,11.825 60.44,12.45 66.925,12.45 69.425,9.95 76.75,9.95 v1(79.2,7.5) ; v1@49.871,11.946 ccw(c50.162,12.237) 50.162,11.825 ; Q2.D@89.709,8.225 v1(90.7,8.225) ; Q2.D@89.984,8.043 cw(c90.423,7.604) 90.423,8.225 cw(c90.423,8.846) Q2.D@89.984,8.407 ; 90.281,8.187 cw(c90.407,7.717) v1@90.65,8.138 ; 90.281,8.263 ccw(c90.407,8.733) v1@90.65,8.312
pads on no net: J3.A J3.B P2.2 P2.3 P2.4 P2.6 P2.7 P2.8 P2.9 P4.A P4.B U1.14 U1.22 U1.35 U1.36 U1.38 U5. U5.1 UB1. UB1.3 UB1.7

## Polygon pours and split planes (outlines as drawn)
GND on Bottom Layer "Top Layer-No Net" (solid, remove dead copper, pour order 2): 0,-0.1 -0.4,0.3 -0.4,18.3 141.3,18.3 142.8,16.8 142.8,-0.2
GND on Top Layer "Top Layer-No Net" (solid, remove dead copper, pour order 3): 0.1,-0.1 -0.3,0.3 -0.3,18.3 141.4,18.3 142.9,16.8 142.9,-0.2

## Keep-outs
Keep-Out Layer:
  circle w0.127: c1.921,3.005 r1.25
  circle w0.127: c70.09,1.605 r1
  circle w0.127: c1.921,15.005 r1.25
  circle w0.127: c70.09,16.405 r1
  circle w0.127: c76.59,2.105 r1.25
  circle w0.127: c133.44,9.005 r1.5
  circle w0.127: c76.59,15.905 r1.25
  lines w0.127: 25.15,5.004 ccw(c25.15,4.004) 24.15,4.004 cw(c23,4.004) 23,2.855 17.19,2.855 cw(c17.19,3.855) 16.19,3.855 16.19,14.155 cw(c17.19,14.155) 17.19,15.155 23,15.155 cw(c23,14.005) 24.15,14.005 ccw(c25.15,14.005) 25.15,13.005 28.09,13.005 cw(c28.09,12.005) 29.09,12.005 29.09,6.005 cw(c28.09,6.005) 28.09,5.005 25.15,5.005 ; 0,2.005 ccw(c2,2.005) 2,0.005 78.645,0.005 ccw(c78.645,0.505) 79.145,0.478 cw(c82.29,0.309) 85.436,0.478 ccw(c85.935,0.505) 85.935,0.005 129.795,0.005 ccw(c129.795,0.505) 130.295,0.478 cw(c133.44,0.309) 133.44,3.459 141.945,3.459 ccw(c137.19,5.005) 142.19,5.005 142.19,13.005 ccw(c137.19,13.005) 141.945,14.55 133.44,14.55 cw(c133.44,17.7) 130.295,17.531 ccw(c129.795,17.505) 129.795,18.005 85.935,18.005 ccw(c85.935,17.505) 85.436,17.531 cw(c82.29,17.7) 79.145,17.531 ccw(c78.645,17.505) 78.645,18.005 2,18.005 ccw(c2,16.005) 0,16.005 0,14.505 ccw(c2,14.505) 1.833,12.512 cw(c1.75,11.515) 2.75,11.515 2.75,6.494 cw(c1.75,6.494) 1.833,5.498 ccw(c2,3.505) 0,3.505 0,2.005

## Other copper
Top Layer:
  region net NetL2_2: 48.375,6.95 48.425,7 52.05,7 52.1,6.95 52.1,6.2 51.975,6.075 48.45,6.075 48.375,6.15
  pour cut-out: 41.025,7.1 41.025,3 41.3,2.725 42.65,2.725 42.925,3 42.925,5.725 43.1,5.9 51.975,5.9 52.1,6.025 52.1,6.975 51.925,7.15
  region net M3V3: 56.3,12.25 56.75,12.7 56.75,14.202 57.2,14.725 57.05,15.025 56.864,15.025 56.3,14.405
Bottom Layer:
  pour cut-out: 10,10.7 16,10.7 16,7 10,7
  pour cut-out: 41.025,7.1 41.025,3 41.3,2.725 42.65,2.725 42.925,3 42.925,5.725 43.1,5.9 51.975,5.9 52.1,6.025 52.1,6.975 51.925,7.15
  region net VBAT: 94.425,1.054 94.425,7.325 95.1,8 97.025,8 97.225,7.8 97.225,1.05
  region net VBUS: 138.75,10.05 137.075,10.05 135.175,11.95 135.175,12.225 135.8,12.225 137.5,10.525 138.75,10.525
Multi-Layer:
  pour cut-out: 131.182,9.017 ccw(c133.452,9.017) 133.452,6.747 ccw(c133.452,9.017) 135.721,9.017 ccw(c133.452,9.017) 133.452,11.287 ccw(c133.452,9.017)
  pour cut-out: 2.236,4.943 1.836,4.943 ccw(c1.836,2.943) -0.164,2.943 ccw(c1.836,2.943) 1.836,0.943 2.236,0.943 ccw(c2.236,2.943) 4.236,2.943 ccw(c2.236,2.943)
  pour cut-out: 2.236,16.843 1.836,16.843 ccw(c1.836,14.843) -0.164,14.843 ccw(c1.836,14.843) 1.836,12.843 2.236,12.843 ccw(c2.236,14.843) 4.236,14.843 ccw(c2.236,14.843)
  pour cut-out: 76.836,17.843 76.436,17.843 ccw(c76.436,15.843) 74.436,15.843 ccw(c76.436,15.843) 76.436,13.843 76.836,13.843 ccw(c76.836,15.843) 78.836,15.843 ccw(c76.836,15.843)
  pour cut-out: 76.836,4.043 76.436,4.043 ccw(c76.436,2.043) 74.436,2.043 ccw(c76.436,2.043) 76.436,0.043 76.836,0.043 ccw(c76.836,2.043) 78.836,2.043 ccw(c76.836,2.043)

## Silkscreen, mask and mechanical layers (free items; w line width, h text height)
Top Overlay:
  circle w0.127: c133.452,9.017 r2.27
  circle w0.127: c76.59,15.905 r1.75
  circle w0.127: c76.59,2.105 r1.75
  circle w0.127: c68.16,11.275 r1.75
  circle w0.127: c78.16,6.735 r1.75
  circle w0.127: c88.16,11.275 r1.75
  circle w0.127: c98.16,6.735 r1.75
  circle w0.127: c108.16,11.275 r1.75
  circle w0.127: c118.16,6.735 r1.75
  circle w0.127: c128.16,11.275 r1.75
  circle w0.508: c15,9 r8.7
  lines w0.127: 65.66,8.775 70.66,8.775 70.66,13.775 65.66,13.775 65.66,8.775 ; 75.66,4.235 80.66,4.235 80.66,9.235 75.66,9.235 75.66,4.235 ; 85.66,8.775 85.66,13.775 90.66,13.775 90.66,8.775 85.66,8.775 ; 95.66,4.235 95.66,9.235 100.66,9.235 100.66,4.235 95.66,4.235 ; 105.66,8.775 105.66,13.775 110.66,13.775 110.66,8.775 105.66,8.775 ; 115.66,4.235 120.66,4.235 120.66,9.235 115.66,9.235 115.66,4.235 ; 125.66,8.775 130.66,8.775 130.66,13.775 125.66,13.775 125.66,8.775
  text "RX2" at 115.4,11.7 h0.8 r90
  text "TX2" at 117.3,11.7 h0.8 r90
  text "JYD-BSMM" at 65,5.5 h0.8
  text "2020-10-30_V1.1" at 63,4.1 h0.8
Bottom Overlay:
  circle w0.127: c133.44,9.005 r2.6
  rectangle: 10.555,10.905 15.762,18.033
  lines w0.254: 8.65,0 8.65,18 ; 20.318,0 9.65,0 9.65,18 20.35,18 20.35,0 ; 21.35,0.005 21.35,18.005
  text "BAT" at 11.3,6.3 h0.76 r90
  text "KEY" at 13.25,6.3 h0.76 r90
  text "GND" at 15.2,6.3 h0.76 r90